# EAGLE board Nusbio.smd (EAGLE 7.4.0)
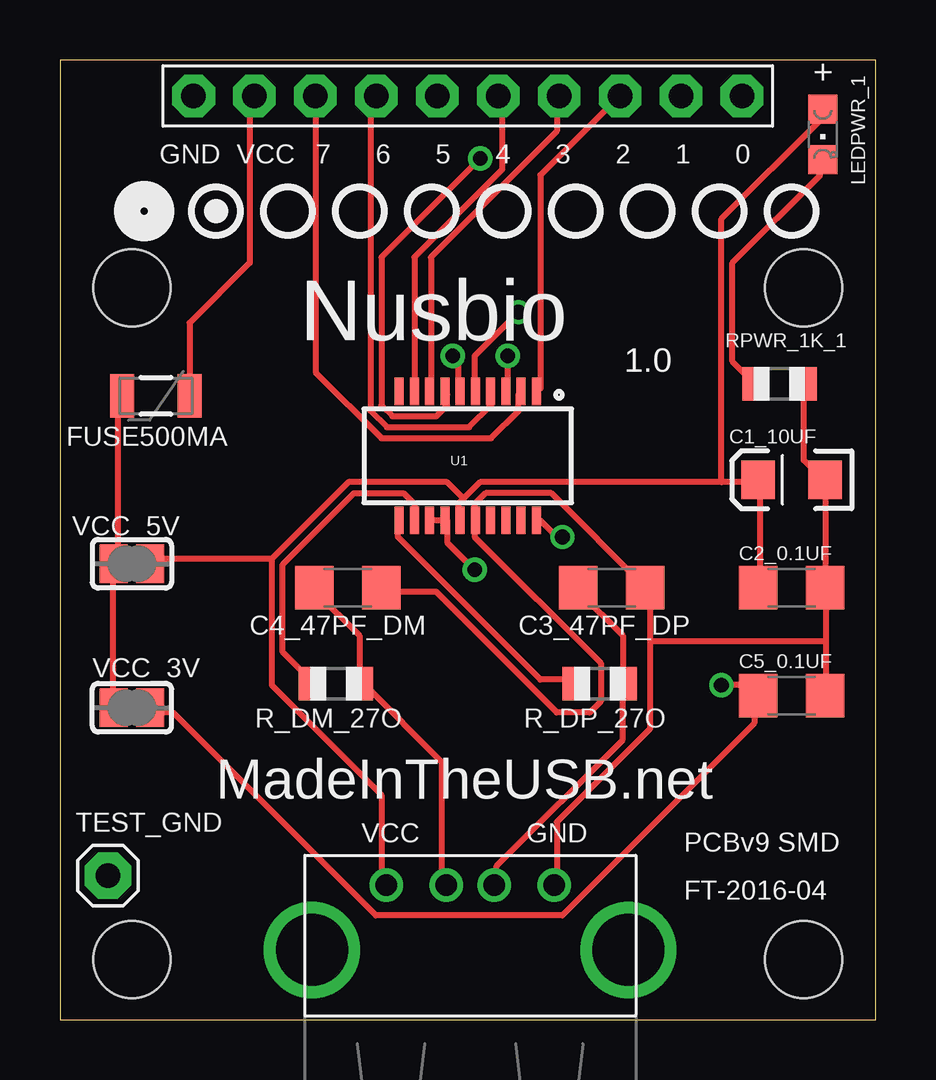
[diagram p0: board, top side]
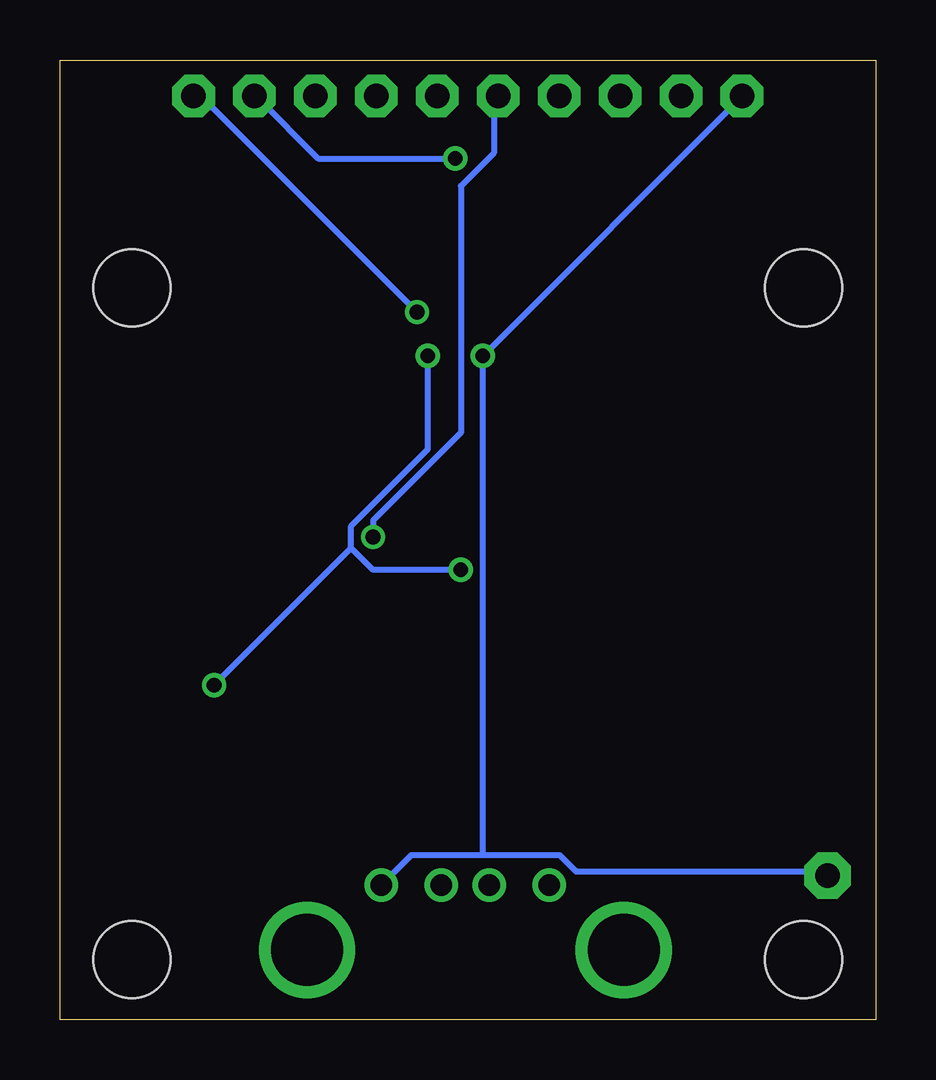
[diagram p1: board, bottom side, seen from below]

Size 34 x 40 mm. Coordinates in mm from the lower left corner, seen from the top.
Outline: 0,0 34,0 34,40 0,40 0,0
Copper layers (1*16): Top 0.035mm / dielectric 1.5mm / Bottom 0.035mm
Design rules "default": minimum track width 10mil, minimum drill 24mil, track to track 8mil, track to pad 8mil, pad to pad 8mil, via to via 8mil, smd to smd 8mil, copper to edge 40mil, drill to drill 8mil, minimum pad ring 10mil, minimum via ring 8mil, stop-mask expansion 4mil, vias tented up to drill 0mil, thermal gap 10mil
Holes 3.2 mm at 3,2.5 31,2.5 3,30.5 31,30.5

## Footprints (pad centres in the part's own frame; a part is rotated, then mirrored left to right if it is on the bottom)
EIA3216 = smd 1.4 x 1.6: A 1.4,0; C -1.4,0
C1206 = smd 1.6 x 1.8: 1 -1.4,0; 2 1.4,0
PTC-1206 = smd 1 x 1.8: 1 -1.4,0; 2 1.4,0
CHIPLED_0805 = smd 1.2 x 1.2: A 0,-1.05; C 0,1.05
R0805 = smd 1.1 x 1.4: 1 -1,0; 2 1,0
1X01 = drill 1.016 pad 1.93 octagon: 1 0,0
SSOP20_L = smd 0.381 x 1.143: 1 -2.857,-2.68; 2 -2.223,-2.68; 3 -1.587,-2.68; 4 -0.953,-2.68; 5 -0.318,-2.68; 6 0.318,-2.68; 7 0.953,-2.68; 8 1.587,-2.68; 9 2.223,-2.68; 10 2.857,-2.68; 11 2.857,2.68; 12 2.223,2.68; 13 1.587,2.68; 14 0.953,2.68; 15 0.318,2.68; 16 -0.318,2.68; 17 -0.953,2.68; 18 -1.587,2.68; 19 -2.223,2.68; 20 -2.857,2.68
1X10-BIG = drill 1.016 pad 1.778 octagon: 1 -11.43,0; 2 -8.89,0; 3 -6.35,0; 4 -3.81,0; 5 -1.27,0; 6 1.27,0; 7 3.81,0; 8 6.35,0; 9 8.89,0; 10 11.43,0
USB-FEMALE-A-PTH = drill 0.9: D+ 5.9,1.3; D- 7.9,1.3; GND 3.4,1.3; VBUS 10.4,1.3 | drill 3: GND@1 13.5,4; GND@2 0.3,4
SOLDERJUMPER_REFLOW = smd 1.168 x 1.6: 1 -0.762,0; 2 0.762,0

## Placement (x,y rotation side)
C1_10UF  10uF  [EIA3216]  30.5,22.5 180 top
C2_0.1UF  [C1206]  30.5,18 0 top
C3_47PF_DP  [C1206]  23,18 180 top
C4_47PF_DM  [C1206]  12,18 180 top
C5_0.1UF  [C1206]  30.5,13.5 0 top
FUSE500MA  PTCSMD  [PTC-1206]  4,26 180 top
LEDPWR_1  [CHIPLED_0805]  31.8,36.9 180 top
R_DM_27O  [R0805]  11.5,14 180 top
R_DP_27O  [R0805]  22.5,14 180 top
RPWR_1K_1  [R0805]  30,26.5 0 top
TEST_GND  [1X01]  2,6 0 top
U1  FTS31XS-U  [SSOP20_L]  17,23.5 180 top
U$1  PINHD-1X10  [1X10-BIG]  17,38.5 180 top
USB_FEMALE  USB  [USB-FEMALE-A-PTH]  24,6.9 180 top
VCC_3V  [SOLDERJUMPER_REFLOW]  3,13 0 top
VCC_5V  [SOLDERJUMPER_REFLOW]  3,19 180 top

## Library data of the parts
C1_10UF = SparkFun-Capacitors; PROD_ID: CAP-00811
C2_0.1UF C3_47PF_DP C4_47PF_DM C5_0.1UF LEDPWR_1 R_DM_27O R_DP_27O RPWR_1K_1 TEST_GND U$1 = adafruit
FUSE500MA = SparkFun-PowerIC; PROD_ID: RES-11150
U1 = SparkFun-DigitalIC; PROD_ID: IC-11524
USB_FEMALE = STUNTAZ
VCC_3V VCC_5V = microbuilder

## Nets
3V3: C5_0.1UF.1 U1.3 U1.13 U1.14 VCC_3V.2
GND: C1_10UF.C C2_0.1UF.2 C3_47PF_DP.1 C4_47PF_DM.1 C5_0.1UF.2 RPWR_1K_1.2 TEST_GND.1 U1.6 U1.16 U$1.10 USB_FEMALE.GND
GPIO0: U1.5 U$1.1
GPIO1: U1.7 U$1.2
GPIO2: U1.1 U$1.3
GPIO3: U1.8 U$1.4
GPIO4: U1.9 U$1.5
GPIO5: U1.20 U$1.6
GPIO6: U1.4 U$1.7
GPIO7: U1.2 U$1.8
N$3: LEDPWR_1.C RPWR_1K_1.1
N$4: R_DM_27O.2 U1.12
N$5: R_DP_27O.2 U1.11
N$7: FUSE500MA.2 VCC_3V.1 VCC_5V.2
N$15: C3_47PF_DP.2 R_DP_27O.1 USB_FEMALE.D+
N$16: C4_47PF_DM.2 R_DM_27O.1 USB_FEMALE.D-
NUSBIO_VCC: FUSE500MA.1 U$1.9
VBUS_IN: C1_10UF.A C2_0.1UF.1 LEDPWR_1.A U1.15 USB_FEMALE.VBUS VCC_5V.1

## Tracks (layer width: path | path; a pad name or v marks a point on that pad's centre or on a via)
3V3  (via drill 0.61)
  Top 0.254: U1.13 15.46,20.8 15.92,20.8 U1.14 16.14,20.8 16.14,19.89 v17.29,18.75 | v18.66,27.66 18.66,26.29 U1.3 | VCC_3V.2 3.8,12.8 4.71,12.8 13.17,4.34 20.95,4.34 28.95,12.34 28.95,13.49 C5_0.1UF.1 28.95,13.72 28.72,13.95 v27.57,13.95
  Bottom 0.254: v18.66,27.66 18.66,23.77 21.86,20.57 21.86,19.66 | 21.86,19.66 20.95,18.75 v17.29,18.75 | v27.57,13.95 21.86,19.66
GND  (via drill 0.61)
  Top 0.254: v16.37,27.66 16.6,27.43 16.6,26.29 U1.6 | RPWR_1K_1.2 31,26.29 31,23.32 31.69,22.63 C1_10UF.C 31.92,22.4 31.92,18.06 C2_0.1UF.2 31.92,17.83 31.92,15.77 | 31.92,15.77 31.92,13.72 C5_0.1UF.2 | C4_47PF_DM.1 13.4,17.83 15.69,17.83 20.72,12.8 22.09,12.8 22.55,13.26 22.55,14.86 17.29,20.12 17.29,20.8 U1.16 17.29,21.03 17.29,21.49 17.75,21.95 20.49,21.95 24.38,18.06 C3_47PF_DP.1 24.6,17.83 24.6,15.77 | 24.6,15.77 24.6,12.12 20.72,8.23 20.72,5.71 USB_FEMALE.GND | 24.6,15.77 31.92,15.77
  Bottom 0.254: U$1.10 5.63,38.41 v16.37,27.66 16.37,6.86 | 16.37,6.86 19.34,6.86 20.49,5.71 USB_FEMALE.GND | 16.37,6.86 13.17,6.86 12.49,6.17 2.2,6.17 TEST_GND.1
GPIO0  (via drill 0.61)
  Top 0.254: v19.12,29.49 17.29,27.66 17.29,26.29 U1.5
  Bottom 0.254: v19.12,29.49 28.26,38.63 U$1.1
GPIO1  (via drill 0.61)
  Top 0.254: v17.52,35.89 13.4,31.77 13.4,25.6 13.86,25.15 15.69,25.15 16.14,25.6 16.14,26.06 U1.7
  Bottom 0.254: v17.52,35.89 23.23,35.89 25.75,38.41 U$1.2
GPIO2
  Top 0.254: U1.1 20.03,26.29 20.03,35.2 23.23,38.41 U$1.3
GPIO3
  Top 0.254: U1.8 15.46,26.29 15.46,31.77 20.72,37.03 20.72,38.41 U$1.4
GPIO4
  Top 0.254: U1.9 14.77,26.29 14.77,31.77 18.43,35.43 18.43,38.41 U$1.5
GPIO5  (via drill 0.61)
  Top 0.254: v20.95,20.12 20.72,20.12 20.03,20.8 U1.20
  Bottom 0.254: v20.95,20.12 20.95,20.8 17.29,24.46 17.29,34.75 15.92,36.12 15.92,38.41 U$1.6
GPIO6
  Top 0.254: U1.4 17.97,26.06 17.97,25.6 17.06,24.69 13.63,24.69 12.95,25.38 12.95,38.18 13.17,38.41 U$1.7
GPIO7
  Top 0.254: U1.2 19.12,26.06 19.12,25.38 17.97,24.23 13.4,24.23 10.66,26.98 10.66,38.41 U$1.8
N$3
  Top 0.254: LEDPWR_1.C 31.69,35.66 31.69,35.2 28.03,31.55 28.03,27.43 28.95,26.52 RPWR_1K_1.1
N$4
  Top 0.254: U1.12 14.77,21.03 14.77,21.49 14.32,21.95 12.26,21.95 9.29,18.97 9.29,15.32 10.43,14.17 R_DM_27O.2
N$5
  Top 0.254: U1.11 14.09,20.8 14.09,20.12 20.03,14.17 21.4,14.17 R_DP_27O.2
N$7
  Top 0.254: VCC_3V.1 2.2,13.03 2.2,18.97 VCC_5V.2 2.43,19.2 2.43,25.83 FUSE500MA.2
N$15
  Top 0.254: C3_47PF_DP.2 21.63,17.83 23.46,16 23.46,14.17 R_DP_27O.1 23.46,13.95 23.46,11.66 18.2,6.4 18.2,5.71 USB_FEMALE.D+
N$16
  Top 0.254: C4_47PF_DM.2 10.66,17.83 12.49,16 12.49,14.17 R_DM_27O.1 12.72,13.95 15.92,10.74 15.92,5.71 USB_FEMALE.D-
NUSBIO_VCC
  Top 0.254: FUSE500MA.1 5.4,26.06 5.4,29.03 7.91,31.55 7.91,38.41 U$1.9
VBUS_IN
  Top 0.254: 16.83,21.72 17.52,22.4 27.57,22.4 | 16.83,21.72 16.6,21.49 16.6,21.03 U1.15 | 27.57,22.4 28.95,22.4 C1_10UF.A 29.18,22.4 29.18,18.06 C2_0.1UF.1 | 27.57,22.4 27.57,33.38 31.69,37.49 31.69,37.95 LEDPWR_1.A | 8.83,19.2 3.8,19.2 VCC_5V.1 | 8.83,19.2 12.03,22.4 16.14,22.4 16.83,21.72 | 8.83,19.2 8.83,13.95 13.4,9.37 13.4,5.71 USB_FEMALE.VBUS

## Text on the board
tNames: + | GND | VCC | 7 | 6 | 5 | 4 | 3 | 2 | 1 | 0 | Nusbio | 1.0 | MadeInTheUSB.net | VCC | GND | PCBv9 SMD | FT-2016-04